# Allegro board demoa2.brd
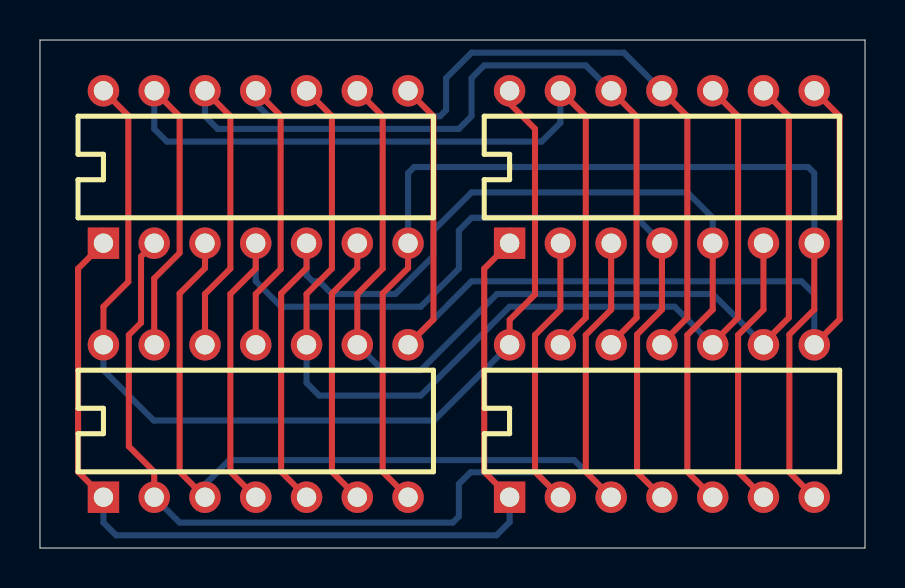
[diagram p0: board, top side]
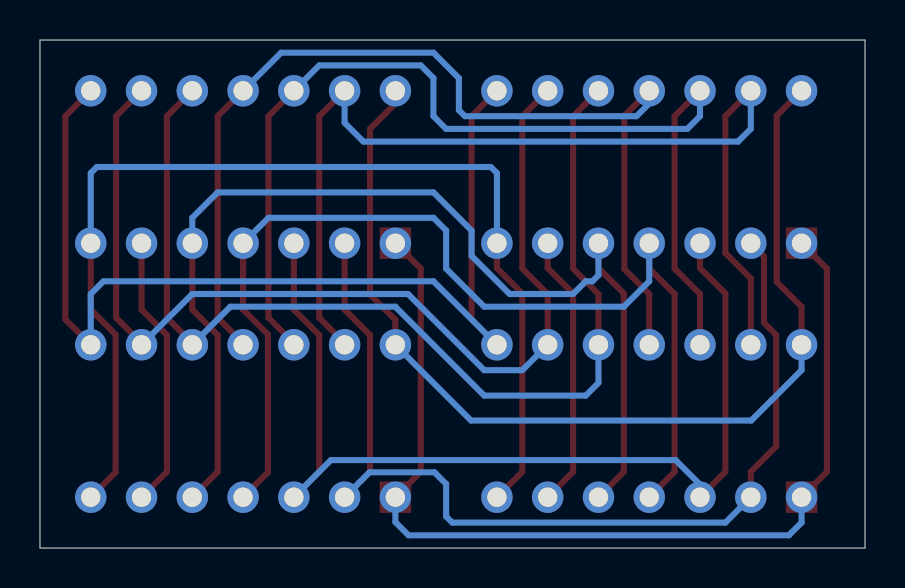
[diagram p1: board, bottom side, seen from below]

Outline 41.27 x 25.4 mm; copper layers: TOP, GND, POWER, INNER1, INNER2, BOTTOM. Coordinates in mm from the lower left corner of the outline.
Outline path: 0,25.4 0,0 41.27,0 41.27,25.4 0,25.4

## Design rules (mm)
nets with their own width: min track width 0.305; nets DAT1 DAT2 DAT3 DAT4 DAT5 DAT6 DAT7 DAT8 DAT9 DAT10 DAT11 DAT12 GND VCC

## Placement (name value [footprint] x y rotation side)
U1  7400  [DIP14]  3.17 15.24 0 top
U2  7400  [DIP14]  23.5 15.24 0 top
U3  7400  [DIP14]  3.17 2.54 0 top
U4  7400  [DIP14]  23.5 2.54 0 top

## Library data of the parts
U1-U4 = 7400

## Footprints (pads in the part's own frame, mm; a bottom-side part is the same pattern mirrored in y, then rotated)
DIP14
  rect 1.575x1.575 hole 0.965: 1(0,0)
  round 1.575 hole 0.965: 2(2.54,0) 3(5.08,0) 4(7.62,0) 5(10.16,0) 6(12.7,0) 7(15.24,0) 8(15.24,7.62) 9(12.7,7.62) 10(10.16,7.62) 11(7.62,7.62) 12(5.08,7.62) 13(2.54,7.62) 14(0,7.62)

## Nets
GND: U1.7(TP-7) U2.7(TP-7) U3.7(TP-7) U4.7(TP-7)
VCC: U1.14(TP-14) U2.14(TP-14) U3.14(TP-14) U4.14(TP-14)
DAT1: U1.2(TP-2) U2.2(TP-2) U3.2(TP-2) U4.2(TP-2)
DAT2: U1.1(TP-1) U2.1(TP-1) U3.1(TP-1) U4.1(TP-1)
DAT3: U1.3(TP-3) U2.3(TP-3) U3.3(TP-3) U4.3(TP-3)
DAT4: U1.5(TP-5) U2.5(TP-5) U3.5(TP-5) U4.5(TP-5)
DAT5: U1.4(TP-4) U2.4(TP-4) U3.4(TP-4) U4.4(TP-4)
DAT6: U1.6(TP-6) U2.6(TP-6) U3.6(TP-6) U4.6(TP-6)
DAT7: U1.10(TP-10) U2.10(TP-10) U3.10(TP-10) U4.10(TP-10)
DAT8: U1.9(TP-9) U2.9(TP-9) U3.9(TP-9) U4.9(TP-9)
DAT9: U1.8(TP-8) U2.8(TP-8) U3.8(TP-8) U4.8(TP-8)
DAT10: U1.13(TP-13) U2.13(TP-13) U3.13(TP-13) U4.13(TP-13)
DAT11: U1.12(TP-12) U2.12(TP-12) U3.12(TP-12) U4.12(TP-12)
DAT12: U1.11(TP-11) U2.11(TP-11) U3.11(TP-11) U4.11(TP-11)

## Routing (per net, layer and track width the routed paths; a pad name or vN(x,y) marks a point on that pad's centre or on a via; arc(x,y) is an arc through that point)
GND: length 55.1
  TOP w0.305: U2.7 38.73,11.92 37.49,10.68 37.49,3.78 U4.7 ; U1.7 18.42,14 17.15,12.73 17.15,3.81 U3.7
  BOTTOM w0.305: U2.7 38.73,18.75 38.43,19.05 18.72,19.05 18.42,18.75 U1.7
VCC: length 52.6
  TOP w0: 23.99,21.73 23.99,22.64
  TOP w0.305: U1.14 4.42,21.62 4.42,13.31 3.17,12.06 U3.14 ; U4.14 23.5,11.4 24.77,12.67 24.77,20.95 23.5,22.23 U2.14
  BOTTOM w0.305: U3.14 3.17,8.89 5.69,6.37 19.71,6.37 U4.14
DAT1: length 50.9
  TOP w0.305: U4.2 24.77,3.81 24.77,10.65 26.04,11.92 U2.2 ; U1.2 5.05,14.58 5.05,11.26 4.45,10.65 4.45,5.08 5.71,3.81 U3.2
  BOTTOM w0.305: U3.2 6.98,1.27 20.65,1.27 20.96,1.57 20.96,3.2 21.54,3.78 24.79,3.78 U4.2
DAT2: length 50.9
  TOP w0.305: U4.1 22.23,3.81 22.23,13.97 U2.1 ; U3.1 1.91,3.81 1.91,13.97 U1.1
  BOTTOM w0.305: U4.1 23.5,1.3 22.83,0.64 3.81,0.64 3.17,1.27 U3.1
DAT3: length 49.7
  TOP w0.305: U4.3 27.31,3.81 27.31,10.65 28.58,11.92 U2.3 ; U1.3 8.26,14 6.98,12.73 6.98,3.81 U3.3
  BOTTOM w0.305: U4.3 26.72,4.39 9.47,4.39 8.26,3.17 U3.3
DAT4: length 54.5
  TOP w0.305: U4.5 32.38,3.81 32.38,10.65 33.66,11.92 U2.5 ; U3.5 12.06,3.81 12.06,12.73 13.33,14 U1.5
  BOTTOM w0.305: U1.5 13.33,13.64 13.64,13.34 13.97,13.34 14.61,12.7 17.78,12.7 19.69,14.61 19.69,15.88 21.59,17.78 32.38,17.78 33.66,16.51 U2.5
DAT5: length 53.7
  TOP w0.305: U3.4 9.53,3.81 9.53,12.7 10.79,13.97 U1.4 ; U4.4 29.87,3.78 29.87,10.68 31.12,11.92 U2.4
  BOTTOM w0.305: U2.4 29.85,16.51 21.59,16.51 20.96,15.88 20.96,13.97 19.05,12.06 12.06,12.06 10.79,13.34 U1.4
DAT6: length 27.5
  TOP w0.305: U1.6 15.88,14 14.61,12.73 14.61,3.81 U3.6 ; U2.6 36.2,11.92 34.92,10.65 34.92,3.81 U4.6
DAT7: length 52.6
  TOP w0.305: U3.10 13.33,12.7 14.61,13.97 14.61,21.59 U1.10 ; U4.10 33.66,10.24 34.92,11.51 34.92,21.59 U2.10
  BOTTOM w0.305: U3.10 13.33,8.26 13.97,7.62 19.05,7.62 23.5,12.06 31.75,12.06 U4.10
DAT8: length 51
  TOP w0.305: U1.9 17.15,21.59 17.15,13.97 15.88,12.7 U3.9 ; U2.9 37.46,21.59 37.46,11.51 36.2,10.24 U4.9
  BOTTOM w0.305: U4.9 33.66,12.7 22.86,12.7 19.05,8.89 17.15,8.89 U3.9
DAT9: length 51.9
  TOP w0.305: U3.8 19.69,11.43 19.69,21.59 U1.8 ; U4.8 40,11.43 40,21.59 U2.8
  BOTTOM w0.305: U4.8 38.73,12.7 38.1,13.34 21.59,13.34 U3.8
DAT10: length 52
  TOP w0.305: U4.13 26.04,10.24 27.31,11.51 27.31,21.59 U2.13 ; U1.13 6.98,21.59 6.98,14.75 5.71,13.48 U3.13
  BOTTOM w0.305: U2.13 26.04,21.26 25.1,20.32 6.35,20.32 5.71,20.95 U1.13
DAT11: length 52.3
  TOP w0.305: U2.12 29.85,21.59 29.85,11.51 28.58,10.24 U4.12 ; U3.12 8.26,12.7 9.53,13.97 9.53,21.59 U1.12
  BOTTOM w0.305: U2.12 27.31,24.13 22.23,24.13 21.59,23.5 21.59,21.59 20.96,20.95 8.89,20.95 8.26,21.59 U1.12
DAT12: length 51.7
  TOP w0.305: U1.11 12.04,21.62 12.04,13.94 10.79,12.7 U3.11 ; U2.11 32.38,21.59 32.38,11.51 31.12,10.24 U4.11
  BOTTOM w0.305: U2.11 29.21,24.77 21.59,24.77 20.32,23.5 20.32,21.89 20.02,21.59 11.43,21.59 10.79,22.23 U1.11
